# EAGLE board power (EAGLE 7.4.0)
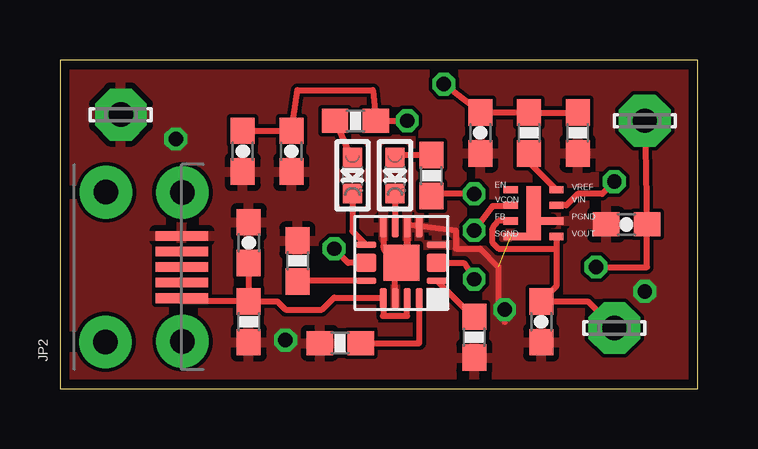
[diagram p0: board, top side]
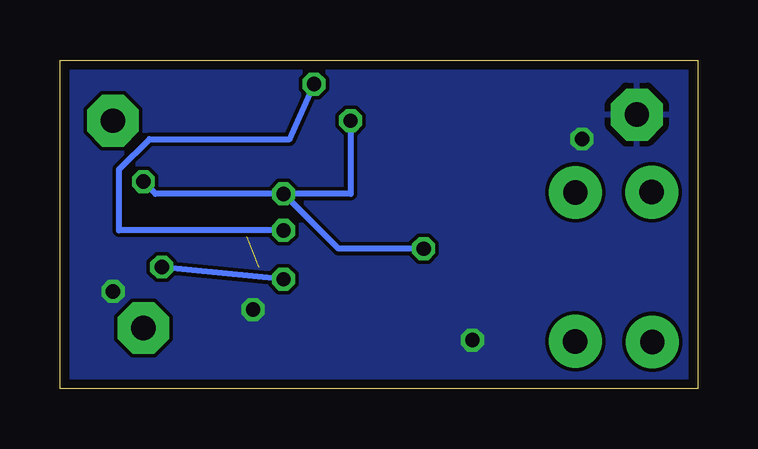
[diagram p1: board, bottom side, seen from below]

Size 26.59 x 13.71 mm. Coordinates in mm from the lower left corner, seen from the top.
Outline: 0,0 26.59,0 26.59,13.71 0,13.71 0,0
Copper layers (1*16): Top 0.0356mm / dielectric 1.5011mm / Bottom 0.0356mm
Design rules "oshpark-2layer": minimum track width 6mil, minimum drill 13mil, track to track 6mil, track to pad 6mil, pad to pad 6mil, via to via 6mil, smd to smd 6mil, copper to edge 15mil, drill to drill 6mil, minimum pad ring 7mil, minimum via ring 7mil, stop-mask expansion 4mil, vias tented up to drill 0mil, thermal gap 10mil

## Footprints (pad centres in the part's own frame; a part is rotated, then mirrored left to right if it is on the bottom)
0603-CAP = smd 1.1 x 1: 1 -0.85,0; 2 0.85,0
MICRO-B-SMT = smd 0.4 x 2.2: 1 -1.3,0; 2 -0.65,0; 3 0,0; 4 0.65,0; 5 1.3,0 | drill 1.016 pad 2.2: P$6 -3.121,3.183; P$7 -3.098,-0.027; P$8 3.122,3.16; P$9 3.108,-0.026
CHIPLED_0603 = smd 0.8 x 0.8: A 0,-0.75; C 0,0.75
LSP10 = drill 1.016 pad 2.159 octagon: MP 0,0
0603-RES = smd 1.1 x 1: 1 -0.85,0; 2 0.85,0
S-PVQFN-N16 = smd 0.85 x 0.28: 1 -0.725,2.225; 4 -0.725,0.725; 9 2.225,0.725; 12 2.225,2.225 | smd 0.85 x 0.78: 2 -0.725,1.475; 10 2.225,1.475 | smd 0.28 x 0.85: 5 0,0; 6 0.5,0; 7 1,0; 8 1.5,0; 13 1.5,2.95; 14 1,2.95; 15 0.5,2.95; 16 0,2.95 | smd 1.5 x 1.5: TH 0.75,1.475
LMZ10500 = smd 0.6 x 0.3: EN 0,1.95; FB 0,0.65; PGND 1.9,0.65; PGND1 1.45,0.65; SGND 0,0; SGND1 0.5,0; VCON 0,1.3; VIN 1.9,1.3; VOUT 1.9,0; VREF 1.9,1.95 | smd 0.6 x 2.25: EN1 0.95,0.975

## Placement (x,y rotation side)
C1  4.7uF  [0603-CAP]  7.62,9.91 90 top
C2  4.7uF  [0603-CAP]  23.62,6.86 180 top
C3  1uF  [0603-CAP]  7.87,6.1 90 top
C4  10uF  [0603-CAP]  20.07,2.79 270 top
C5  10uF  [0603-CAP]  9.65,9.91 90 top
C6  470pF  [0603-CAP]  17.53,10.67 270 top
JP2  [MICRO-B-SMT]  5.08,5.08 90 top
LED1  [CHIPLED_0603]  13.97,8.89 180 top
LED2  [CHIPLED_0603]  12.19,8.89 180 top
LSP1  LSP10  [LSP10]  2.54,11.43 0 top
LSP2  LSP10  [LSP10]  24.38,11.18 0 top
LSP3  LSP10  [LSP10]  23.11,2.54 0 top
R1  1.18k  [0603-RES]  9.91,5.33 270 top
R2  1.13k  [0603-RES]  11.68,1.91 0 top
R3  10k  [0603-RES]  17.27,2.16 90 top
R4  1k  [0603-RES]  15.49,8.89 90 top
R5  1k  [0603-RES]  12.32,11.18 180 top
R6  10k  [0603-RES]  7.87,2.79 270 top
R7  118k  [0603-RES]  19.56,10.67 270 top
R8  150k  [0603-RES]  21.59,10.67 90 top
U$1  BQ24072  [S-PVQFN-N16]  14.99,6.73 180 top
U$2  LMZ10500  [LMZ10500]  18.8,6.35 0 top

## Library data of the parts
C1-C6 = SparkFun-Capacitors
JP2 = SparkFun-Connectors; PROD_ID: CONN-09900
LED1 LED2 = microbuilder
LSP1-LSP3 = solpad
R1-R6 = SparkFun-Resistors
R7 R8 = SparkFun-Passives
U$1 = Simplex-ICs
U$2 = LMZ10500

## Nets
BAT: C2.1 LSP2.MP U$1.2
GND: C1.1 C2.2 C3.2 C4.2 C5.1 C6.2 JP2.5 LSP1.MP R1.1 R2.1 R3.1 R6.2 R8.1 U$1.4 U$1.5 U$1.6 U$1.8 U$1.14 U$2.PGND U$2.SGND
N$1: R7.2 U$2.VREF
N$2: C6.1 R7.1 R8.2 U$2.VCON
N$3: R1.2 U$1.12
N$5: R2.2 U$1.16
N$6: R3.2 U$1.1
N$9: C1.2 C5.2 R4.1 R5.1 U$1.10 U$2.VIN
N$10: LED1.A R4.2
N$11: LED2.A R5.2
N$12: LED2.C U$1.9
N$13: LED1.C U$1.7
N$14: C3.1 JP2.1 R6.1 U$1.13 U$1.15
VOUT: C4.1 LSP3.MP U$2.FB U$2.VOUT

## Tracks (layer width: path | path; a pad name or v marks a point on that pad's centre or on a via)
BAT  (via drill 0.6)
  Top 0.254: LSP2.MP C2.1 24.47,5.08 v22.35,5.08 | U$1.2 16.84,5.26 v17.27,4.57
  Bottom 0.254: v17.27,4.57 v22.35,5.08
GND  (via drill 0.6)  (1 unrouted)
  Top 0.254: 13.99,5.06 13.97,5.08 | U$1.6 14.49,5.56 | U$1.14 13.97,3.78 13.97,5.08 | 13.97,5.08 14.1,5.21 | 14.1,5.21 14.48,5.59 14.48,6.86 16.51,6.6 16.51,5.84 17.53,5.84 18.29,5.08 18.29,3.05 18.54,2.79 | U$1.8 13.49,5.95 arc45 13.58,5.72 14.1,5.21
  other vias: 4.83,10.41 9.4,2.03 18.54,3.3 24.38,4.06
  pour Top: 26.92,14.22 -0.76,14.22 -0.76,-0.51 26.92,-0.51
  pour Bottom: -0.51,14.22 -0.51,-0.76 26.92,-1.02 26.92,13.97
N$1
  Top 0.254: R7.2 19.56,9.44 U$2.VREF
N$2  (via drill 0.6)
  Top 0.254: R8.2 R7.1 C6.1 17.36,11.68 v16,12.7 | U$2.VCON 18.77,7.62 18.03,7.62 v17.27,6.6
  Bottom 0.254: v17.27,6.6 24.13,6.6 24.13,9.14 22.86,10.41 17.02,10.41 v16,12.7
N$3
  Top 0.254: U$1.12 10.16,4.51 R1.2
N$5
  Top 0.254: R2.2 14.99,1.91 U$1.16
N$6
  Top 0.254: U$1.1 16.99,3.24 R3.2
N$9  (via drill 0.6)
  Top 0.254: C1.2 C5.2 9.91,12.45 13.04,12.45 R5.1 v14.48,11.18 | U$1.10 12.02,5.26 v11.43,5.84 | v17.27,8.13 15.58,8.13 R4.1 | v23.11,8.64 22.61,8.13 21.59,8.13 21.11,7.65 U$2.VIN
  Bottom 0.254: v11.43,5.84 14.99,5.84 v17.27,8.13 | v17.27,8.13 22.61,8.13 v23.11,8.64 | v14.48,11.18 14.48,8.13 v17.27,8.13
N$10
  Top 0.254: R4.2 13.97,9.74 LED1.A
N$11
  Top 0.254: R5.2 12.1,9.73 LED2.A
N$12
  Top 0.254: LED2.C 12.19,6.58 U$1.9
N$13
  Top 0.254: LED1.C 13.97,6.75 U$1.7
N$14
  Top 0.254: C3.1 R6.1 | R6.1 5.08,3.64 JP2.1 | R6.1 9.06,3.64 9.4,3.3 10.92,3.3 11.43,3.81 13.46,3.81 U$1.13 13.49,3.07 13.46,3.05 14.48,3.05 14.48,3.77 U$1.15
VOUT
  Top 0.254: LSP3.MP 22.01,3.64 C4.1 20.7,4.27 20.7,5.84 | U$2.VOUT 20.7,5.84 | U$2.FB 18.29,7 18.13,6.84 arc45 18.03,6.61 18.03,6.1 18.29,5.84 20.7,5.84